# Altium PCB ESP-LED-5x5PCB.PcbDoc
Units mil, origin at the board's own origin, x right, y up, seen from the top; angles counter-clockwise.
Board outline 2010.03 x 2010.03 mil, 2 copper layers (Top Layer, Bottom Layer); 34 components, 25 nets, 150 pads, 32 vias.
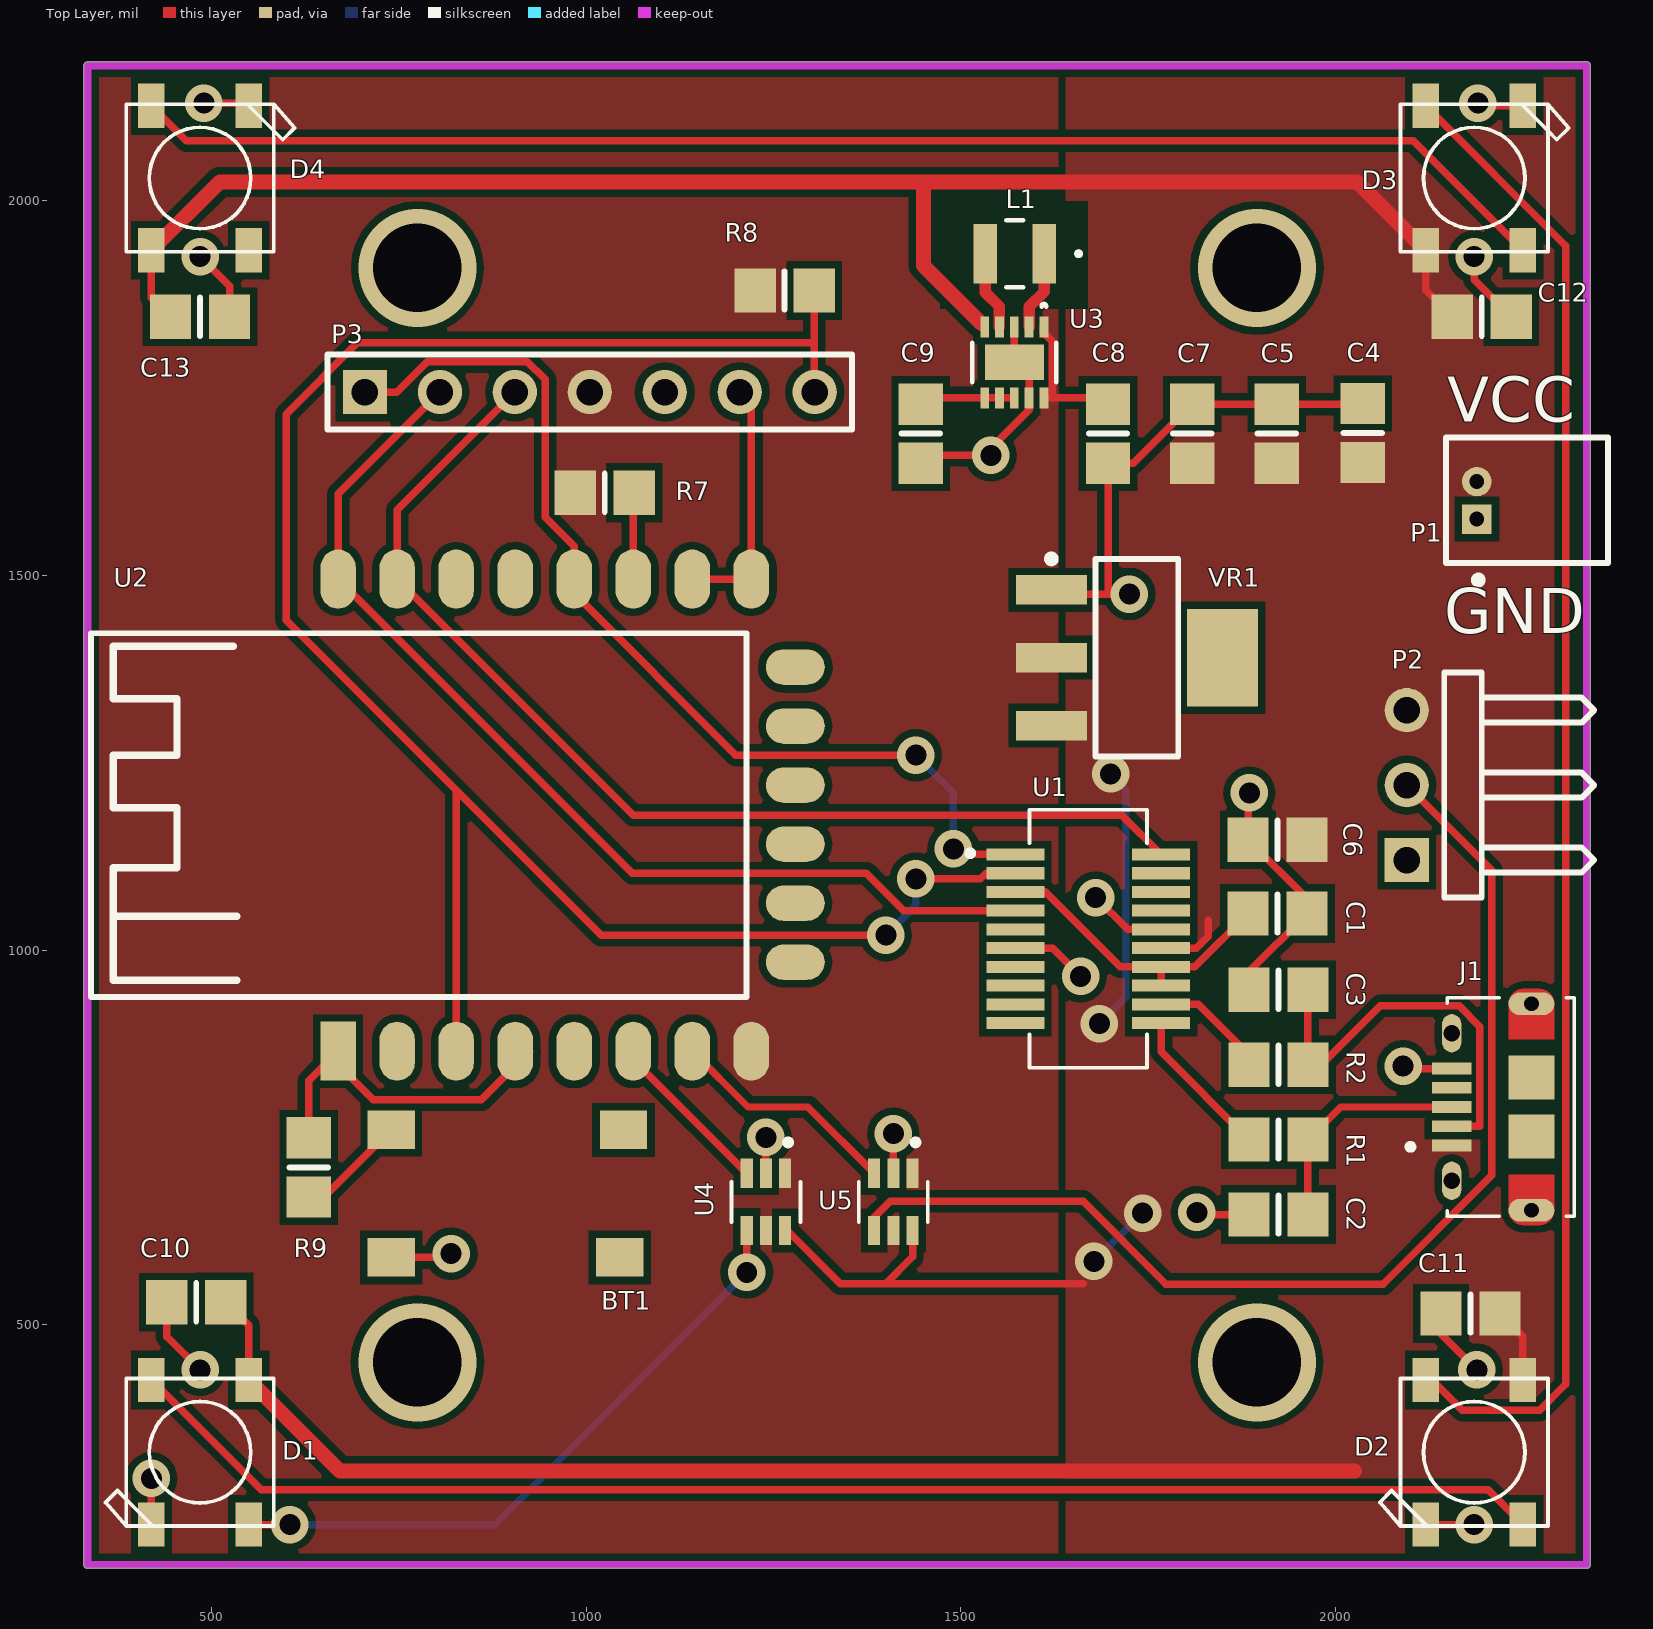
[diagram p0: Top Layer view]
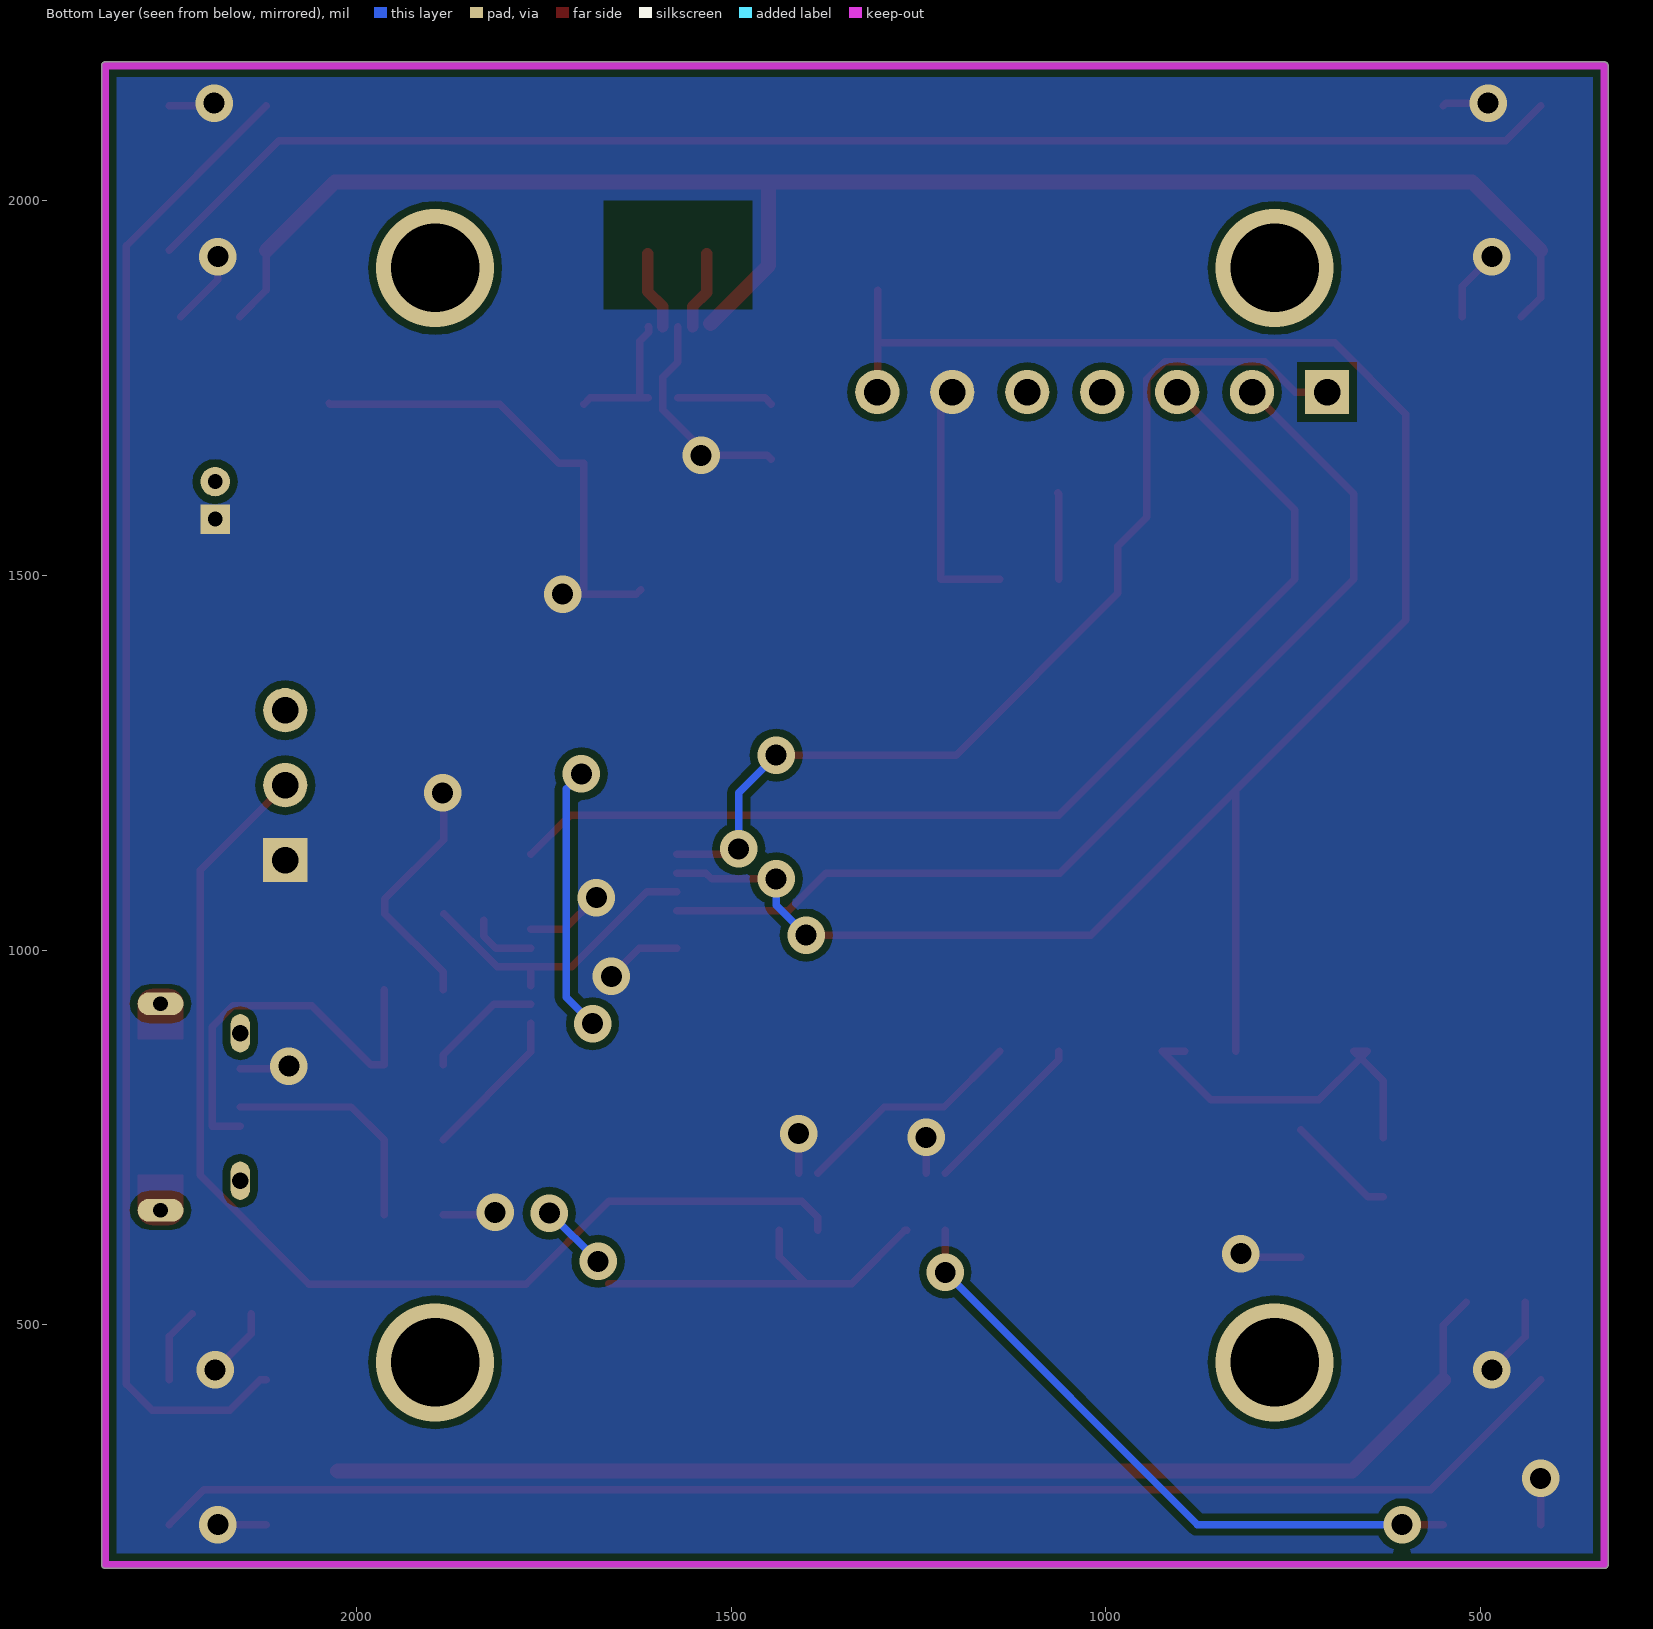
[diagram p1: Bottom Layer view, seen from below]

## Layer stack, top to bottom
Top Solder: solder mask 0.4, Solder Resist, Dk 3.5
Top Layer: signal copper 1.4
Dielectric 1: dielectric 12.6, FR-4, Dk 4.8
Bottom Layer: signal copper 1.4
Bottom Solder: solder mask 0.4, Solder Resist, Dk 3.5

## Board outline
329.99,180 ccw(c335,180) 335,174.99 2335,174.99 ccw(c2335,180) 2340.01,180 2340.01,2180 ccw(c2335,2180) 2335,2185.01 335,2185.01 ccw(c335,2180) 329.99,2180

## Design rules (kind name [scope] priority, off if disabled: settings)
Clearance [All] p1: gap=10 ignorepadtopadclearanceinfootprint=FALSE except(0: Arc-Hole Track-Hole SMDPad-Hole THPad-Hole Via-Hole Fill-Hole Poly-Hole Region-Hole Text-Hole; 6: Arc-Arc Arc-Track Arc-SMDPad Arc-THPad Track-Track Track-SMDPad Track-THPad SMDPad-SMDPad SMDPad-THPad SMDPad-Via THPad-THPad THPad-Via)
PolygonConnect [All] p1: connectstyle=Direct reliefconductorwidth=10 reliefentries=4 polygonreliefangle="90 Angle" airgapwidth=10
RoutingVias [All] p1: holewidth=28 width=50 viastyle="Through Hole" minholewidth=28 minwidth=50 maxholewidth=28 maxwidth=50
SolderMaskExpansion [All] p1: expansion=4
Width [All] p1: maxlimit=25 minlimit=6 preferedwidth=10 minimp=50.000000 maximp=50.000000 favimp=50.000000
30 further rules are at their usual default settings.

## Components (designator, comment, footprint, x,y, rotation, side; value= is the part's Value field where it differs from the comment)
BT1 "SMT_Button" SMT_Button 740,590 r0 top
C1 "100nF" 6-0805_M 1922.56,1048.72 r180 top value=100pF
C2 "47pF" 6-0805_M 1923.78,647.1 r180 top value=100pF
C3 "47pF" 6-0805_M 1923.78,947.1 r180 top value=100pF
C4 "100nF" 6-0805_M 2036.4,1689.94 r90 top value=100pF
C5 "4.7uF" 6-0805_M 1921.4,1689 r90 top value=100pF
C6 "10nF" 6-0805_M 1922.56,1147.1 r0 top value=100pF
C7 "10uF" 6-0805_M 1808.65,1689 r270 top value=100pF
C8 "10uF" 6-0805_M 1696.4,1689 r90 top value=100pF
C9 "0.1uF" 6-0805_M 1446.4,1689 r90 top value=100pF
C10 "10uF" 6-0805_M 480,530 r180 top value=100pF
C11 "10uF" 6-0805_M 2180,515 r180 top value=100pF
C12 "10uF" 6-0805_M 2195,1845 r0 top value=100pF
C13 "10uF" 6-0805_M 485,1845 r0 top value=100pF
D1 "WS2812B" *WS2812B_WS2812B(Primary) 485,330 r90 top
D2 "WS2812B" *WS2812B_WS2812B(Primary) 2185,330 r90 top
D3 "WS2812B" *WS2812B_WS2812B(Primary) 2185,2030 r270 top
D4 "WS2812B" *WS2812B_WS2812B(Primary) 485,2030 r270 top
J1 "10118194-0001LF" *AMPHENOL_10118194-0001LF_10118194-0001LF(Primary) 2261.3,790.59 r90 top
L1 "1.5uH" DFE252012P-1R0M= 1572.03,1929 r180 top value=Value
P1 "Header 2" Molex_53048-0210_0 2255.41,1600 r90 top
P2 "Header 3H" HDR1X3H 2095,1120.04 r90 top
P3 "Header 7" HDR1X7 705,1744.5 r0 top
R1 "27R" 6-0805_M 1923.78,747.1 r180 top value=1K
R2 "27R" 6-0805_M 1923.78,847.1 r180 top value=1K
R7 "12K" 6-0805_M 1025,1610 r0 top value=1K
R8 "12K" 6-0805_M 1265,1880 r0 top value=1K
R9 "1K" 6-0805_M 630,710 r90 top
U1 "FT231XS-R" *SOP63P599X175-20N 1670,1015 r0 top
U2 "ESP12-F" ESP12-F 669.26,865 r90 top
U3 "Part Number: TPS63031DSKR" DSK10_2X1P2 1571.4,1784 r270 top value=Value
U4 "74LVC1T45GW,125" *SOT65P210X110-6N 1240,664.03 r270 top
U5 "74LVC1T45GW,125" *SOT65P210X110-6N 1410,664.03 r270 top
VR1 "Volt Reg" SOT223_N 1735,1390 r0 top

## Footprints (in the part's own frame and the unit in brackets; to place one, negate y for a bottom-side part, rotate by r counter-clockwise, add the part's x,y. Pads: shape width x height; smd on the part's side, far side on the other; paste and mask are expansions set on the pad)
6-0805_M [mm] "Chip Resistor, Body 2.0x1.2mm, IPC Low Density"
  rect 1.4x1.5 smd: 1(-1,0) 2(1,0)
  silkscreen extent 0,-0.65 0,0.65, body extent -1.07,-0.7 1.07,0.7, height 0.7
*AMPHENOL_10118194-0001LF_10118194-0001LF(Primary) [mm]
  rect 0.4x1.35 smd: 1(-1.3,2.7) 2(-0.65,2.7) 3(0,2.7) 4(0.65,2.7) 5(1.3,2.7)
  oval 1.3x0.65 hole 0.55: S1(-2.5,2.7) S2(2.5,2.7)
  oval 0.775x1.55 hole 0.5: S3(-3.5,0) S6(3.5,0)
  rect 1.5x1.55 smd: S4(-1,0) S5(1,0)
  Top Layer region: 3.5,-0.775 3.5,-0.575 3.507,-0.575 3.52,-0.574 3.533,-0.573 3.546,-0.571 3.558,-0.568 3.571,-0.565 3.583,-0.561 3.596,-0.556 3.608,-0.551 3.619,-0.545 3.631,-0.538 3.642,-0.531 3.652,-0.523 3.662,-0.515 3.672,-0.506 3.681,-0.497 3.69,-0.487 3.698,-0.477 3.706,-0.467 3.713,-0.456 3.72,-0.444 3.726,-0.433 3.731,-0.421 3.736,-0.408 3.74,-0.396 3.743,-0.383 3.746,-0.371 3.748,-0.358 3.749,-0.345 3.75,-0.332 3.75,-0.325 3.75,0.325 3.75,0.332 3.749,0.345 3.748,0.358 3.746,0.371 3.743,0.383 3.74,0.396 3.736,0.408 3.731,0.421 3.726,0.433 3.72,0.444 3.713,0.456 3.706,0.467 3.698,0.477 3.69,0.487 3.681,0.497 3.672,0.506 3.662,0.515 3.652,0.523 3.642,0.531 3.631,0.538 3.619,0.545 3.608,0.551 3.596,0.556 3.583,0.561 3.571,0.565 3.558,0.568 3.546,0.571 3.533,0.573 3.52,0.574 3.507,0.575 3.5,0.575 3.5,0.775 3.513,0.775 3.539,0.774 3.565,0.771 3.591,0.767 3.617,0.761 3.642,0.755 3.667,0.746 3.691,0.737 3.715,0.726 3.739,0.715 3.761,0.701 3.783,0.687 3.804,0.672 3.825,0.655 3.844,0.638 3.863,0.619 3.88,0.6 3.897,0.579 3.912,0.558 3.926,0.536 3.94,0.514 3.951,0.49 3.962,0.466 3.971,0.442 3.98,0.417 3.986,0.392 3.992,0.366 3.996,0.34 3.999,0.314 4,0.288 4,0.275 4,-0.275 4,-0.288 3.999,-0.314 3.996,-0.34 3.992,-0.366 3.986,-0.392 3.98,-0.417 3.971,-0.442 3.962,-0.466 3.951,-0.49 3.94,-0.514 3.926,-0.536 3.912,-0.558 3.897,-0.579 3.88,-0.6 3.863,-0.619 3.844,-0.638 3.825,-0.655 3.804,-0.672 3.783,-0.687 3.761,-0.701 3.739,-0.715 3.715,-0.726 3.691,-0.737 3.667,-0.746 3.642,-0.755 3.617,-0.761 3.591,-0.767 3.565,-0.771 3.539,-0.774 3.513,-0.775 3.5,-0.775
  Top Layer region: 3.5,-0.775 3.5,-0.575 3.493,-0.575 3.48,-0.574 3.467,-0.573 3.454,-0.571 3.442,-0.568 3.429,-0.565 3.417,-0.561 3.404,-0.556 3.392,-0.551 3.381,-0.545 3.369,-0.538 3.358,-0.531 3.348,-0.523 3.338,-0.515 3.328,-0.506 3.319,-0.497 3.31,-0.487 3.302,-0.477 3.294,-0.467 3.287,-0.456 3.28,-0.444 3.274,-0.433 3.269,-0.421 3.264,-0.408 3.26,-0.396 3.257,-0.383 3.254,-0.371 3.252,-0.358 3.251,-0.345 3.25,-0.332 3.25,-0.325 3.25,0.325 3.25,0.332 3.251,0.345 3.252,0.358 3.254,0.371 3.257,0.383 3.26,0.396 3.264,0.408 3.269,0.421 3.274,0.433 3.28,0.444 3.287,0.456 3.294,0.467 3.302,0.477 3.31,0.487 3.319,0.497 3.328,0.506 3.338,0.515 3.348,0.523 3.358,0.531 3.369,0.538 3.381,0.545 3.392,0.551 3.404,0.556 3.417,0.561 3.429,0.565 3.442,0.568 3.454,0.571 3.467,0.573 3.48,0.574 3.493,0.575 3.5,0.575 3.5,0.775 2.3,0.775 2.3,-0.775 3.5,-0.775
  Top Layer region: -3.5,0.775 -3.5,0.575 -3.507,0.575 -3.52,0.574 -3.533,0.573 -3.546,0.571 -3.558,0.568 -3.571,0.565 -3.583,0.561 -3.596,0.556 -3.608,0.551 -3.619,0.545 -3.631,0.538 -3.642,0.531 -3.652,0.523 -3.662,0.515 -3.672,0.506 -3.681,0.497 -3.69,0.487 -3.698,0.477 -3.706,0.467 -3.713,0.456 -3.72,0.444 -3.726,0.433 -3.731,0.421 -3.736,0.408 -3.74,0.396 -3.743,0.383 -3.746,0.371 -3.748,0.358 -3.749,0.345 -3.75,0.332 -3.75,0.325 -3.75,-0.325 -3.75,-0.332 -3.749,-0.345 -3.748,-0.358 -3.746,-0.371 -3.743,-0.383 -3.74,-0.396 -3.736,-0.408 -3.731,-0.421 -3.726,-0.433 -3.72,-0.444 -3.713,-0.456 -3.706,-0.467 -3.698,-0.477 -3.69,-0.487 -3.681,-0.497 -3.672,-0.506 -3.662,-0.515 -3.652,-0.523 -3.642,-0.531 -3.631,-0.538 -3.619,-0.545 -3.608,-0.551 -3.596,-0.556 -3.583,-0.561 -3.571,-0.565 -3.558,-0.568 -3.546,-0.571 -3.533,-0.573 -3.52,-0.574 -3.507,-0.575 -3.5,-0.575 -3.5,-0.775 -3.513,-0.775 -3.539,-0.774 -3.565,-0.771 -3.591,-0.767 -3.617,-0.761 -3.642,-0.755 -3.667,-0.746 -3.691,-0.737 -3.715,-0.726 -3.739,-0.715 -3.761,-0.701 -3.783,-0.687 -3.804,-0.672 -3.825,-0.655 -3.844,-0.638 -3.863,-0.619 -3.88,-0.6 -3.897,-0.579 -3.912,-0.558 -3.926,-0.536 -3.94,-0.514 -3.951,-0.49 -3.962,-0.466 -3.971,-0.442 -3.98,-0.417 -3.986,-0.392 -3.992,-0.366 -3.996,-0.34 -3.999,-0.314 -4,-0.288 -4,-0.275 -4,0.275 -4,0.288 -3.999,0.314 -3.996,0.34 -3.992,0.366 -3.986,0.392 -3.98,0.417 -3.971,0.442 -3.962,0.466 -3.951,0.49 -3.94,0.514 -3.926,0.536 -3.912,0.558 -3.897,0.579 -3.88,0.6 -3.863,0.619 -3.844,0.638 -3.825,0.655 -3.804,0.672 -3.783,0.687 -3.761,0.701 -3.739,0.715 -3.715,0.726 -3.691,0.737 -3.667,0.746 -3.642,0.755 -3.617,0.761 -3.591,0.767 -3.565,0.771 -3.539,0.774 -3.513,0.775 -3.5,0.775
  Top Layer region: -3.5,0.775 -3.5,0.575 -3.493,0.575 -3.48,0.574 -3.467,0.573 -3.454,0.571 -3.442,0.568 -3.429,0.565 -3.417,0.561 -3.404,0.556 -3.392,0.551 -3.381,0.545 -3.369,0.538 -3.358,0.531 -3.348,0.523 -3.338,0.515 -3.328,0.506 -3.319,0.497 -3.31,0.487 -3.302,0.477 -3.294,0.467 -3.287,0.456 -3.28,0.444 -3.274,0.433 -3.269,0.421 -3.264,0.408 -3.26,0.396 -3.257,0.383 -3.254,0.371 -3.252,0.358 -3.251,0.345 -3.25,0.332 -3.25,0.325 -3.25,-0.325 -3.25,-0.332 -3.251,-0.345 -3.252,-0.358 -3.254,-0.371 -3.257,-0.383 -3.26,-0.396 -3.264,-0.408 -3.269,-0.421 -3.274,-0.433 -3.28,-0.444 -3.287,-0.456 -3.294,-0.467 -3.302,-0.477 -3.31,-0.487 -3.319,-0.497 -3.328,-0.506 -3.338,-0.515 -3.348,-0.523 -3.358,-0.531 -3.369,-0.538 -3.381,-0.545 -3.392,-0.551 -3.404,-0.556 -3.417,-0.561 -3.429,-0.565 -3.442,-0.568 -3.454,-0.571 -3.467,-0.573 -3.48,-0.574 -3.493,-0.575 -3.5,-0.575 -3.5,-0.775 -2.3,-0.775 -2.3,0.775 -3.5,0.775
  Top Layer lines w0: -3.5,0.77 -3.5,0.6 ; 3.5,-0.6 3.5,-0.77
  silkscreen extent -3.7,-1.45 3.7,4.2
*SOP63P599X175-20N [mm]
  rect 1.97x0.41 smd: 1(-2.47,2.857) 2(-2.47,2.222) 3(-2.47,1.587) 4(-2.47,0.953) 5(-2.47,0.318) 6(-2.47,-0.318) 7(-2.47,-0.953) 8(-2.47,-1.587) 9(-2.47,-2.222) 10(-2.47,-2.857) 11(2.47,-2.857) 12(2.47,-2.222) 13(2.47,-1.587) 14(2.47,-0.953) 15(2.47,-0.318) 16(2.47,0.318) 17(2.47,0.953) 18(2.47,1.587) 19(2.47,2.222) 20(2.47,2.857)
  silkscreen extent -4.1,-4.37 1.99,4.37
*SOT65P210X110-6N [mm]
  rect 0.99x0.41 smd: 1(-0.97,0.65) 2(-0.97,0) 3(-0.97,-0.65) 4(0.97,-0.65) 5(0.97,0) 6(0.97,0.65)
  silkscreen extent -2.11,-1.17 0.68,1.17
*WS2812B_WS2812B(Primary) [mm]
  rect 1.5x0.9 smd: 1-VDD(2.45,-1.65) 2-DOUT(2.45,1.65) 3-GND(-2.45,1.65) 4-DIN(-2.45,-1.65)
  silkscreen extent -2.5,-2.5 2.5,3.2
DFE252012P-1R0M= [mm]
  rect 0.8x2.007 smd paste+0 mask+0: 1(-1,0) 2(1,0)
  silkscreen extent -2.24,-1.13 0.29,1.13, body extent 0,0 0.25,0.25, height 0.25
DSK10_2X1P2 [mm]
  rect 0.704x0.3 smd paste-0.15 mask+0: 1(-1.202,1) 2(-1.202,0.5) 3(-1.202,0) 4(-1.202,-0.5) 5(-1.202,-1) 6(1.202,-1) 7(1.202,-0.5) 8(1.202,0) 9(1.202,0.5) 10(1.202,1)
  rect 1.2x2 smd paste-0.987 mask-0.991: 11(0,0)
  Top Layer region: 0,-1 0,-1 0,-1 0,-1 0,-1 0,-1 0,-1 0,-1
  Top Layer region: 0,1 0,1 0,1 0,1 0,1 0,1 0,1 0,1
  silkscreen extent -1.98,-1.43 0.67,1.43, body extent 0,0 0.25,0.25, height 0.25
ESP12-F [mm]
  rect 2x1.2 smd: 1(0,0)
  oval 2x1.2 smd: 2(0,-2) 3(0,-4) 4(0,-6) 5(0,-8) 6(0,-10) 7(0,-12) 8(0,-14) 15(16,-14) 16(16,-12) 17(16,-10) 18(16,-8) 19(16,-6) 20(16,-4) 21(16,-2) 22(16,0)
  oval 1.2x2 smd: 9(3.018,-15.492) 10(5.018,-15.492) 11(7.018,-15.492) 12(9.018,-15.492) 13(11.018,-15.492) 14(13.018,-15.492)
  silkscreen extent 1.84,-13.84 14.17,8.38
HDR1X3H [mm] "Connector; Header; 3 Position; Right Angle"
  rect 1.5x1.5 hole 0.9: 1(0,0)
  round 1.5 hole 0.9: 2(2.54,0) 3(5.08,0)
  silkscreen extent -1.27,-6.35 6.35,-1.27
HDR1X7 [mm] "Connector; Header; 7 Position"
  rect 1.5x1.5 hole 0.9: 1(0,0)
  round 1.5 hole 0.9: 2(2.54,0) 3(5.08,0) 4(7.62,0) 5(10.16,0) 6(12.7,0) 7(15.24,0)
  silkscreen extent -1.27,-1.27 16.51,1.27
Molex_53048-0210_0 [mm]
  rect 1x1 hole 0.5 paste-1000 mask+0: 1(-0.635,1.7)
  round 1 hole 0.5 paste-1000 mask+0: 2(0.635,1.7)
  silkscreen extent -2.82,-2.75 2.12,2.75, body extent -2.32,-2.95 2.32,2.95, height 0.25
SMT_Button [mm]
  rect 1.6x1.3 smd: 1(0,4.318) 2(7.874,4.318) 3(0,0) 4(7.747,0)
  body extent -0.76,-0.64 8.64,4.95, height 4.3
SOT223_N [mm] "SOT223, 4-Leads, Body 6.5x3.5mm, Pitch 2.3mm, Lead Span 7mm, IPC Medium Density"
  rect 2.4x1 smd: 1(-2.9,2.3) 2(-2.9,0) 3(-2.9,-2.3)
  rect 2.4x3.3 smd: 4(2.9,0)
  silkscreen extent -3.02,-3.35 1.4,3.47, body extent -1.85,-3.35 1.85,3.35, height 1.7

## Part data
C1 C2 C3 C4 C5 C6 C7 C8 C9 C10 C11 C12 C13: library part Cap, "Capacitor", LatestRevisionDate=17-Jul-2002, LatestRevisionNote="Re-released for DXP Platform.", PackageDescription="Radial Cap, Thru-Hole; 2 Leads; 0.3 in Pin Spacing", PackageReference=RAD-0.3, Published=8-Jun-2000, Publisher="Altium Limited"
D1 D2 D3 D4: "Intelligent Control Led Integrated Light Source Pack Of 10", Package=None, Digi-Key_Part_Number=1597-1565-ND, Digi-Key_Purchase_URL=https://www.digikey.ca/product-detail/en/seeed-technology-co-ltd/110060865/1597-1565-ND/7650479?utm_source=snapeda&utm_medium=aggregator&utm_campaign=symbol, MF=Worldsemi, MP=WS2812B, SnapEDA_Link=https://www.snapeda.com/parts/WS2812B/Seeed%20Technology%20Co.%2C%20Ltd/view-part/?ref=snap
J1: "Micro Usb, 2.0 Type b, Rcpt, Smt", Package=None, Availability=Unavailable, MF="Amphenol ICC", MP=10118194-0001LF, Price=None, SnapEDA_Link=https://www.snapeda.com/parts/10118194-0001LF/Amphenol%20ICC/view-part/?ref=snap
L1: library part DFE252012P-1R5M=, "No Description Available", Manufacturer_Part_Number=DFE252012P-1R5M=P2, Built_By=EMA_UL_Team, Copyright="Copyright (C) 2018 Accelerated Designs. All rights reserved", RefDes=RefDes, Type=DEV, Vendor=Murata
P1: "Header, 2-Pin", LatestRevisionDate=17-Jul-2002, LatestRevisionNote="Re-released for DXP Platform.", Publisher="Altium Limited"
P2: "Header, 3-Pin, Right Angle", LatestRevisionDate=17-Jul-2002, LatestRevisionNote="Re-released for DXP Platform.", Publisher="Altium Limited"
P3: "Header, 7-Pin", LatestRevisionDate=17-Jul-2002, LatestRevisionNote="Re-released for DXP Platform.", Publisher="Altium Limited"
R1 R2 R7 R8 R9: library part Res1, "Resistor", LatestRevisionDate=17-Jul-2002, LatestRevisionNote="Re-released for DXP Platform.", PackageDescription="Axial Device, Thru-Hole; 2 Leads; 0.3 in Pin Spacing", PackageReference=AXIAL-0.3, Published=8-Jun-2000, Publisher="Altium Limited"
U1: "USB Full Speed to Full Handshake UART with USB Charger Detection", Package="SSOP-20 FTDI", Digi-Key_Part_Number=768-1129-1-ND, Digi-Key_Purchase_URL=https://www.digikey.com/product-detail/en/ftdi-future-technology-devices-international-ltd/FT231XS-R/768-1129-1-ND/3029151?utm_source=snapeda&utm_medium=aggregator&utm_campaign=symbol, MF=FTDI,, MP=FT231XS-R, SnapEDA_Link=https://www.snapeda.com/parts/FT231XS-R/FTDI%2C%20Future%20Technology%20Devices%20International%20Ltd/view-part/?ref=snap
U3: library part TPS63031DSKR, "No Description Available", Manufacturer="Texas Instruments", Built_By=EMA_UL_Team, Copyright="Copyright (C) 2018 Accelerated Designs. All rights reserved", Manufacturer_Part_Number=TPS63031DSKR, RefDes=RefDes, Type=DEV, Vendor="Texas Instruments"
U4 U5: "74LVC_H_1T45 - Dual supply translating transceiver; 3-state", Package="SOT-363 Nexperia USA", Availability=Unavailable, MF="Nexperia USA", MP=74LVC1T45GW,125, Price=None, SnapEDA_Link=https://www.snapeda.com/parts/74LVC1T45GW%2C125/Nexperia%20USA%20Inc./view-part/?ref=snap
VR1: "Voltage Regulator", LatestRevisionDate=29-May-2009, LatestRevisionNote="IPC-7351 Footprint Added.", PackageDescription="3-Pin Transistor Outline Package 2.54 mm Pitch, 15.1 mm Lead Span", PackageReference=D2PAK, Published=24-Mar-1999, Publisher="Altium Limited"

## Via types
v1: diameter 50, hole 28, Top Layer to Bottom Layer, 28 vias
v2: diameter 157.48, hole 118.11, Top Layer to Bottom Layer, 4 vias

## Nets (pads, with @x,y where several pads share a name; then routed paths per layer and width w, separated by ;. In a path a pad name is that pad's centre, name@x,y a point inside that pad or via, vN(x,y) a via of type N, cw(c..) or ccw(c..) an arc to the next point about the centre after c; other vN are vias at no path point)
3V3: C8.2 P3.4 R7.1 R8.1 U2.8 U3.1 U3.10 U4.1 U4.5 U5.1 U5.5 VR1.2 | length 189.5
  Top Layer w10: U3.10 1621.77,1736.68 ; U3.1 1609.87,1831.32 1609.87,1824.08 1621.77,1812.18 1621.77,1736.68 ; C8.2 1688.09,1736.68 1621.77,1736.68
DTR: P3.1 U1.1 U2.18 | length 1369.9
  Top Layer w10: P3.1@705,1720 P3.1 747.69,1744.5 788.21,1785.03 921.79,1785.03 945.53,1761.29 945.53,1577.46 984.22,1538.77 U2.18 984.22,1475.78 1200,1260 v1(1440,1260) ; v1(1490,1135) 1497.5,1127.5 U1.1
  Bottom Layer w10: v1(1440,1260) 1490,1210 v1(1490,1135)
GND: BT1.3 C1.1 C2.2 C3.2 C4.2 C5.2 C6.1 C7.1 C8.1 C9.1 C10.2 C11.2 C12.2 C13.2 D1.3-GND D2.3-GND D3.3-GND D4.3-GND J1.5 P1.1 P2.1 P3.6 U1.6 U1.16 U2.15 U2.16 U3.3 U3.9 U3.11 U4.2 U5.2 VR1.1 | length 2791.5
  Top Layer w10: v1(420,295) v1(420,295) D1.3-GND ; C10.2 440.63,484.37 v1(485,440) ; v1(485,1925) 524.37,1885.63 C13.2 ; v1(490,2130) 546.42,2130 D4.3-GND ; BT1.3 815,590 v1(820,595) ; U2.16 U2.15 1220.44,1729.06 P3.6 ; U4.2 v1(1240,750) ; U5.2 v1(1410,755) ; C9.1@1446.4,1654.63 1451.77,1660 v1(1540,1660) 1540,1669.5 1591.09,1720.59 U3.9 1591.09,1764.32 U3.11 U3.3 ; U1.6 1622.5,1002.5 v1(1660,965) ; VR1.1 1626.38,1475 1695,1475 ; v1(1680,1070) 1722.5,1027.5 U1.16 ; v1(1725,1475) 1695,1475 ; v1(1815,650) 1817.9,647.1 C2.2 ; C3.2 1884.41,971.2 C1.1 1961.93,1068.36 C6.1 1883.19,1209.72 v1(1885,1209.72) ; C4.2 2035.46,1728.37 C5.2 C7.1 1729.91,1649.63 C8.1 1696.4,1476.4 1695,1475 ; v1(2090,845) 2093.23,841.77 J1.5 ; D2.3-GND v1(2185,233.54) ; C11.2 2140.63,487.85 v1(2188.48,440) ; v1(2185,1925) 2185,1894.37 C12.2 ; v1(2190,2130) 2193.54,2126.46 D3.3-GND
LED1: D1.4-DIN U4.4 | length 859.7
  Top Layer w10: D1.4-DIN v1(605,233.54) ; v1(1214.41,570) U4.4
  Bottom Layer w10: v1(605,233.54) 877.95,233.54 v1(1214.41,570)
LED2: P2.2 U5.4 | length 1524.3
  Top Layer w10: U5.4 1384.41,643.36 1406.05,665 1663.11,665 1773.7,554.41 2063.69,554.41 2208.57,699.29 2208.57,1106.46 P2.2
NetBT1_1: BT1.1 R9.1 | length 147
  Top Layer w10: R9.1 650.63,670.63 BT1.1
NetC1_2: C1.2 U1.3 U1.13 U1.14 | length 406.4
  Top Layer w10: U1.3 1612.5,1077.5 1712.5,977.5 U1.14 ; U1.13 U1.14 ; C1.2 1811.97,977.5 U1.14
NetC2_1: C2.1 J1.3 R1.1 | length 309.9
  Top Layer w10: C2.1 R1.1 2006.64,790.59 J1.3
NetC3_1: C3.1 J1.2 R2.1 | length 543.9
  Top Layer w10: C3.1 R2.1 1980.96,847.1 2059.46,925.61 2164.86,925.61 2192.57,897.89 2192.57,765 J1.2
NetC9_2: C9.2 U3.6 U3.7 U3.8 | length 128.4
  Top Layer w10: C9.2 1454.71,1736.68 U3.6 U3.7 U3.8
NetD1_2-DOUT: D1.2-DOUT D2.4-DIN | length 1909.8
  Top Layer w10: D1.2-DOUT 566.5,280 2203.5,280 D2.4-DIN
NetD2_2-DOUT: D2.2-DOUT D3.4-DIN | length 2001.2
  Top Layer w10: D2.2-DOUT 2128.54,426.46 2169.07,385.93 2272.23,385.93 2306.81,420.51 2306.81,1939.69 D3.4-DIN
NetD3_2-DOUT: D3.2-DOUT D4.4-DIN | length 1909.8
  Top Layer w10: D4.4-DIN 466.5,2080 2103.5,2080 D3.2-DOUT
NetL1_1: L1.1 U3.2 | length 106.1
  Top Layer w15: U3.2 1591.37,1831.6 1591.37,1858.68 1611.4,1878.71 L1.1
NetL1_2: L1.2 U3.4 | length 105.6
  Top Layer w15: L1.2 1532.66,1877.46 1551.44,1858.68 1551.44,1831.6 U3.4
NetR1_2: R1.2 U1.11 | length 203.9
  Top Layer w10: U1.11 1767.24,864.27 R1.2
NetR2_2: R2.2 U1.12 | length 158.1
  Top Layer w10: U1.12 1817.02,927.5 1884.41,860.11 R2.2
NetR7_2: R7.2 U2.17 | length 115.7
  Top Layer w10: U2.17 1062.96,1608.59 R7.2
NetU2_6: U2.6 U4.3 | length 225.5
  Top Layer w10: U2.6 1062.96,853.66 U4.3
NetU2_7: U2.7 U5.3 | length 310.1
  Top Layer w10: U2.7 1216.11,790.59 1296.04,790.59 U5.3
RST: R9.2 U2.1 U2.4 | length 507.6
  Top Layer w10: R9.2 630,825.74 U2.1@660.22,855.96 ; U2.4@895,865 U2.4 925,865 860,800 716.18,800 U2.1@660.22,855.96 ; U2.1@660.22,855.96 651.18,865 U2.1 U2.1@660.22,855.96
RTS: P3.7 R8.2 U1.2 U2.3 | length 2704.1
  Top Layer w10: U2.3 826.74,1213.26 ; R8.2 1304.37,1810 ; P3.7 1304.37,1745.13 1304.37,1810 ; v1(1400,1020) 1020,1020 826.74,1213.26 ; v1(1440,1095) 1526.28,1095 1533.78,1102.5 U1.2 ; 826.74,1213.26 600,1440 600,1715 695,1810 1304.37,1810
  Bottom Layer w10: v1(1400,1020) 1440,1060 v1(1440,1095)
RX: P3.3 U1.20 U2.21 | length 1486
  Top Layer w10: P3.3 748,1587.5 U2.21 1062.92,1180 1714.74,1180 U1.20
TX: P3.2 U1.4 U2.22 | length 1392.6
  Top Layer w10: P3.2 669.26,1608.76 U2.22 1061.68,1102.5 1374.07,1102.5 1424.07,1052.5 U1.4
VIN: C4.1 C5.1 C6.2 C7.2 C10.1 C11.1 C12.1 C13.1 D1.1-VDD D2.1-VDD D3.1-VDD D4.1-VDD J1.1 P1.2 P2.3 U1.15 U3.5 U4.6 U5.6 VR1.3 | length 4998.1
  Top Layer w10: D4.1-VDD 420.04,1870.59 C13.1 ; C10.1 549.96,499.41 D1.1-VDD ; U4.6 1268.53,625.84 1339.37,555 1400,555 ; U5.6 1435.59,590.59 1400,555 ; 1663.11,555 1400,555 ; v1@1680,901.81 v1(1685,901.81) ; U1.15 1814.34,1002.5 1830,1018.16 1830,1040 ; D3.1-VDD 2120.04,1880.59 C12.1 ; C11.1 2249.96,484.41 D2.1-VDD
  Top Layer w20: D4.1-VDD 511.5,2025 1450,2025 ; D1.1-VDD 671.42,305 2025,305 ; U3.5@1527.32,1836.04 1450,1913.35 1450,2025 ; D3.1-VDD 2028.58,2025 1450,2025
  Bottom Layer w10: v1(1677.65,584.74) 1741.81,648.9 v1(1742.65,648.9) ; v1(1685,901.81) 1720,936.81 1720,1214.89 v1(1699.89,1235)
pads on no net: BT1.2 BT1.4 D4.2-DOUT J1.4 J1.S1 J1.S2 J1.S3 J1.S4 J1.S5 J1.S6 P3.5 U1.5 U1.7 U1.8 U1.9 U1.10 U1.17 U1.18 U1.19 U2.2 U2.5 U2.9 U2.10 U2.11 U2.12 U2.13 U2.14 U2.19 U2.20 VR1.4
copper on no net:
  other v2: 775,450 1895,450 775,1910 1895,1910

## Polygon pours and split planes (outlines as drawn)
3V3 on Top Layer "Top Layer-3V3" (solid, pour order 14): 335,2180 335,180 1630,180 1630,2180
VIN on Top Layer "Top Layer-VIN" (solid, pour order 12): 2335,180 2335,2180 1640,2180 1640,180
no net on Top Layer "NONET_L01_P010" (solid, pour order 10): 2335,2180
no net on Top Layer "NONET_L01_P008" (solid, pour order 8): 335,2180
GND on Bottom Layer "Bottom Layer-GND" (solid, pour order 4): 335,2180 335,180 2335,180 2335,2180

## Keep-outs
Keep-Out Layer:
  lines w10: 335,180 335,2180 2335,2180 2335,180 335,180

## Other copper
Multi-Layer:
  pour cut-out: 1471.99,2000 1471.99,1855 1670,1855 1670,2000

## Silkscreen, mask and mechanical layers (free items; w line width, h text height)
Top Overlay:
  text "VCC" at 2149.09,1705 h60
  text "GND" at 2145,1422.68 h60